# Altium PCB 2104and540_DIP.PcbDoc
Units mil, origin at the board's own origin, x right, y up, seen from the top; angles counter-clockwise.
Board outline 10436 x 9159 mil, 2 copper layers (Top Layer, Bottom Layer); 19 components, 21 nets, 70 pads, 27 vias.
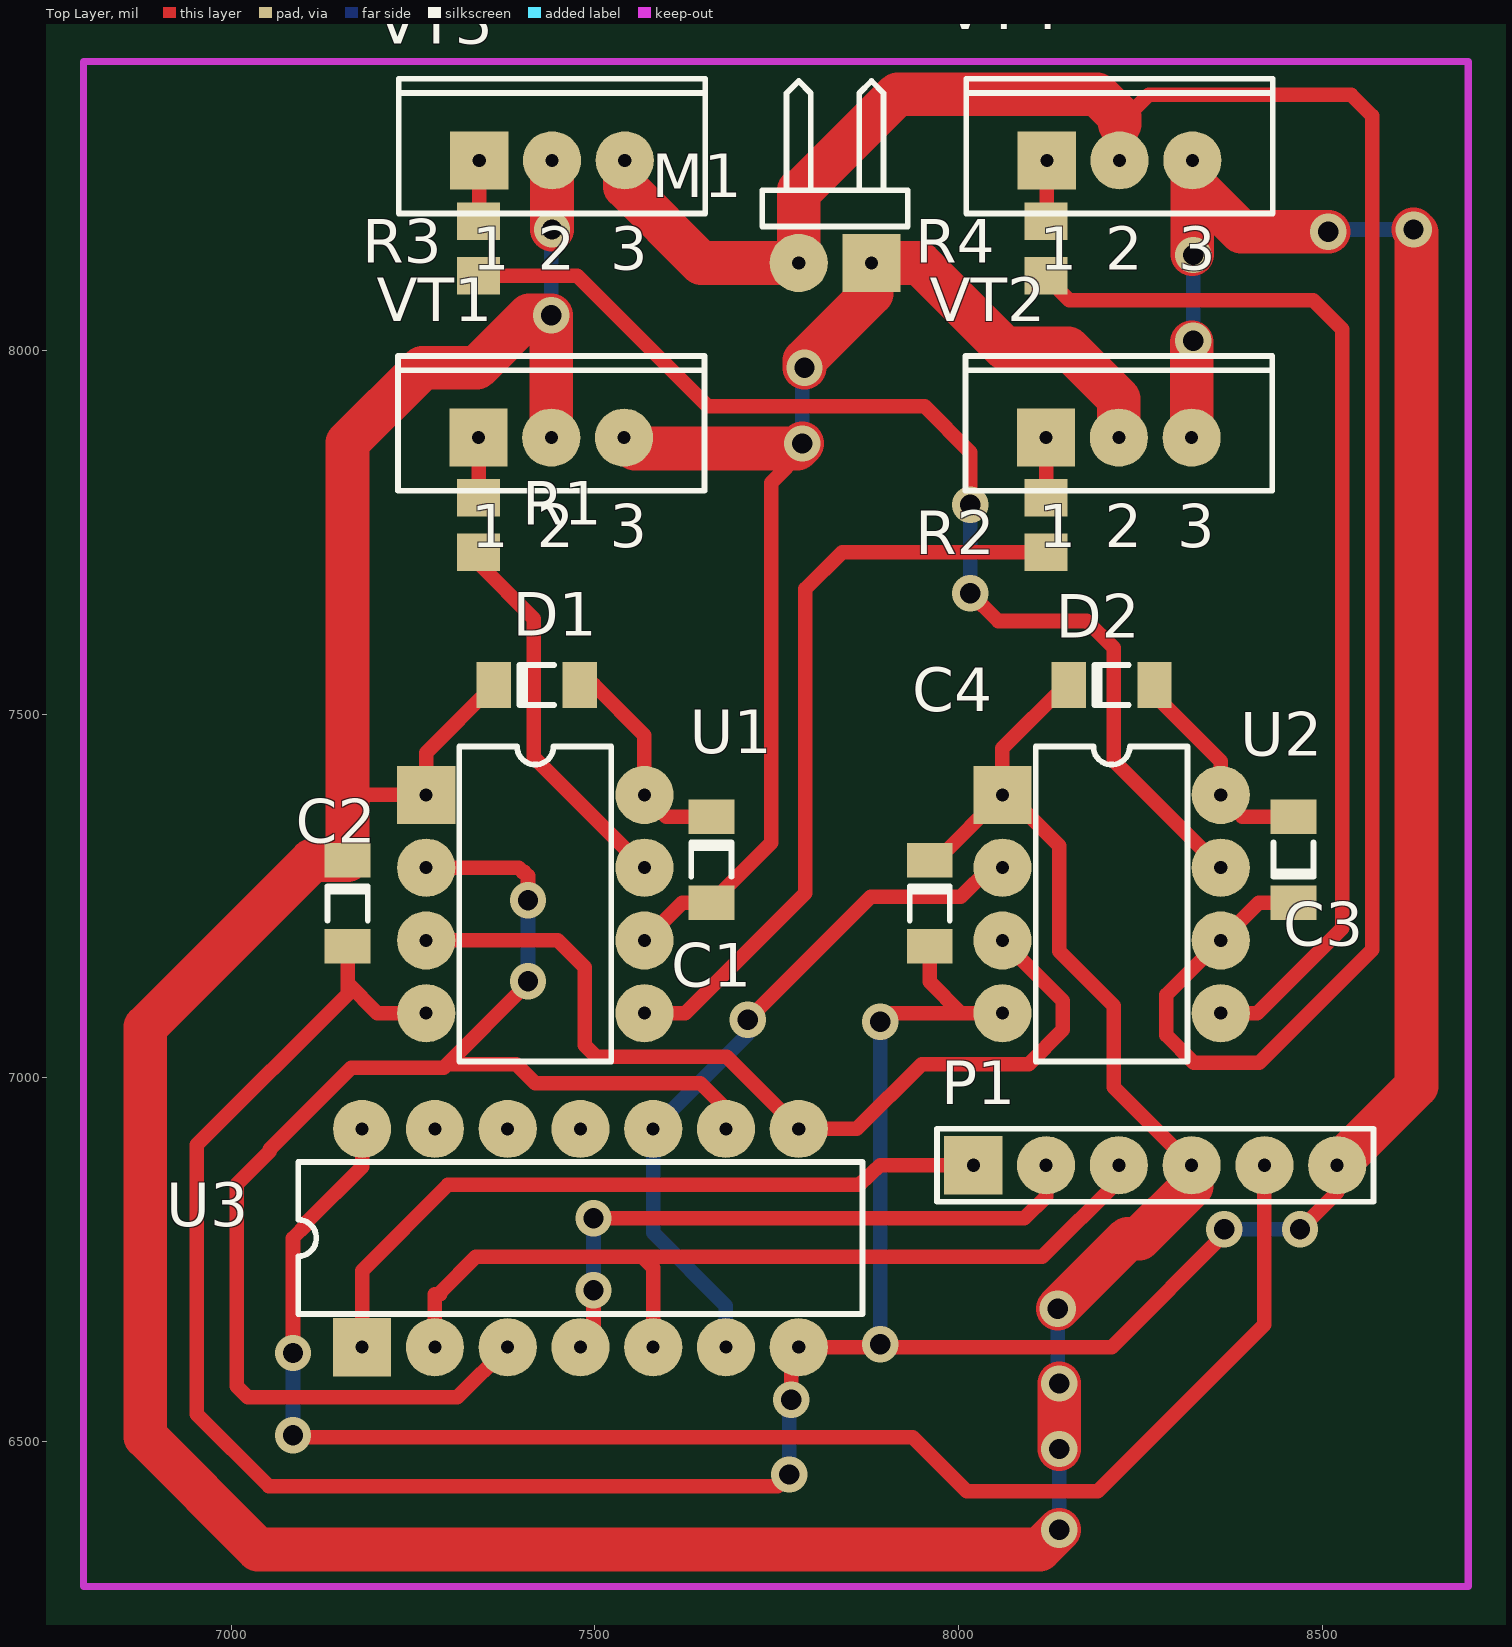
[diagram p0: Top Layer view]
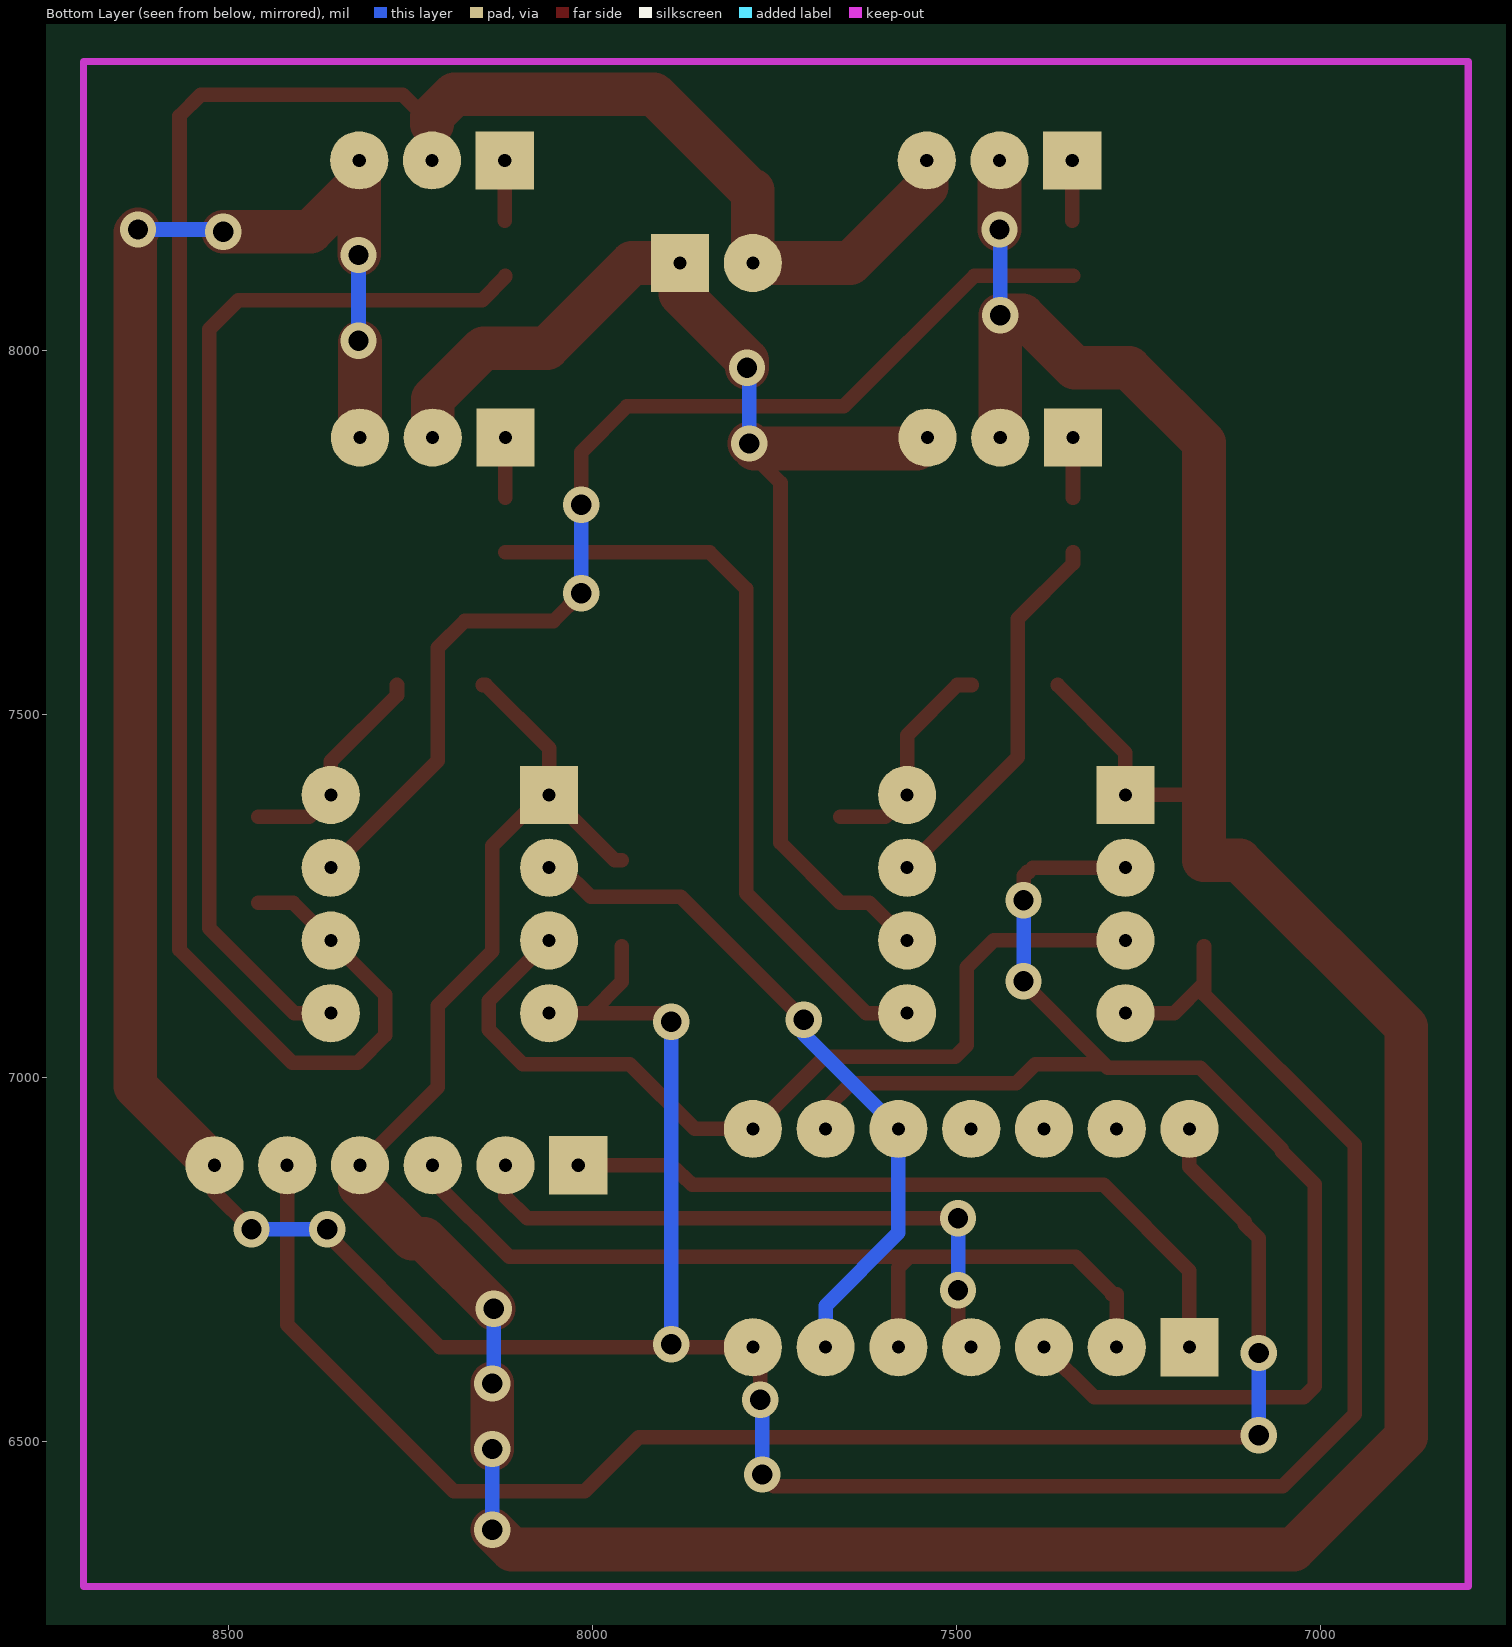
[diagram p1: Bottom Layer view, seen from below]

## Layer stack, top to bottom
Top Layer: signal copper 1.4
Dielectric: dielectric 12.6, FR-4, Dk 4.8
Bottom Layer: signal copper 1.4

## Board outline
1259,9943 1259,1040 11695,1040 11695,10199 1259,10199

## Design rules (kind name [scope] priority, off if disabled: settings)
Clearance [All] p1: gap=10
ComponentClearance [All] p1: gap=10 collisioncheckmode=3 verticalgap=10
PolygonConnect [All] p1: connectstyle=Relief reliefconductorwidth=10 reliefentries=4 polygonreliefangle="90 Angle"
RoutingVias [All] p1: holewidth=28 width=50 viastyle="Through Hole" minholewidth=28 minwidth=50 maxholewidth=28 maxwidth=50
SolderMaskExpansion [All] p1: expansion=4
TestPointUsage [All] p1: valid=0 allowmultiple=FALSE
Testpoint [All] p1: side=15 testpointundercomponent=TRUE minsize=40 maxsize=100 preferedsize=60 minholesize=0 maxholesize=40 preferedholesize=32 testpointgrid=1 style=1023 order=0123456789
Width [All] p1: maxlimit=20 minlimit=10 preferedwidth=10 toplayer_minwidth=20 toplayer_prefwidth=20 bottomlayer_minwidth=20 bottomlayer_prefwidth=20 minimp=50.000000 maximp=50.000000 favimp=50.000000
17 further rules are at their usual default settings.

## Components (designator, comment, footprint, x,y, rotation, side; value= is the part's Value field where it differs from the comment)
C1 "" INDC3216-1206 7660,7300 r270 top
C2 "" INDC3216-1206 7160,7240 r270 top
C3 "Cap" INDC3216-1206 8460,7300 r90 top
C4 "Cap" INDC3216-1206 7960,7240 r270 top
D1 "Diode 1N4148" INDC3216-1206 7420,7540 r0 top
D2 "5819" INDC3216-1206 8210,7540 r0 top
M1 "Motor" HDR1X2H 7880,8120 r180 top
P1 "Header 5" HDR1X6 8020,6880 r0 top (schematic designator P?)
R1 "10" CR2012-0805 7340,7760 r90 top
R2 "10" CR2012-0805 8120,7760 r90 top
R3 "10" CR2012-0805 7340,8140 r270 top
R4 "10" CR2012-0805 8120,8140 r270 top
U1 "IR2104" PDIP8 7418,7239 r270 top
U2 "IR2104" PDIP8 8210,7239 r270 top
U3 "MC74HC00AN" 646-06 7480,6780 r0 top
VT1 "IRF540N" TO-220AB 7440,7880 r0 top
VT2 "IRF540N" TO-220AB 8220,7880 r0 top
VT3 "IRF540N" TO-220AB 7441,8261 r0 top
VT4 "IRF540N" TO-220AB 8221,8261 r0 top

## Footprints (in the part's own frame and the unit in brackets; to place one, negate y for a bottom-side part, rotate by r counter-clockwise, add the part's x,y. Pads: shape width x height; smd on the part's side, far side on the other; paste and mask are expansions set on the pad)
646-06 [mil] "DIP; 14 Leads; Row Spacing 7.62 mm; Pitch 2.54 mm"
  rect 80x80 hole 18: 1(-300,-150)
  round 80 hole 18: 2(-200,-150) 3(-100,-150) 4(0,-150) 5(100,-150) 6(200,-150) 7(300,-150) 8(300,150) 9(200,150) 10(100,150) 11(0,150) 12(-100,150) 13(-200,150) 14(-300,150)
  silkscreen extent -388,-104 388,104
CR2012-0805 [mm] "Chip Resistor; Body 2.0 x 1.3 mm (LxW typ)"
  rect 1.3x1.5 smd: 1(-0.95,0) 2(0.95,0)
HDR1X2H [mil] "Connector; Header; 2 Position; Right Angle"
  rect 80x80 hole 18: 1(0,0)
  round 80 hole 18: 2(100,0)
  silkscreen extent -50,-250 150,-50
HDR1X6 [mil] "Connector; Header; 6 Position"
  rect 80x80 hole 18: 1(0,0)
  round 80 hole 18: 2(100,0) 3(200,0) 4(300,0) 5(400,0) 6(500,0)
  silkscreen extent -50,-50 550,50
INDC3216-1206 [mm] "3216 Chip; Chip Inductor; Body 3.2 x 1.6 mm (LxW typ)"
  rect 1.2x1.6 smd: 1(-1.5,0) 2(1.5,0)
  silkscreen extent -0.6,-0.7 0.6,0.7
PDIP8 [mil] "DIP; 8 Leads; Row Spacing 7.62 mm; Pitch 2.54 mm"
  rect 80x80 hole 18: 1(-150,-150)
  round 80 hole 18: 2(-50,-150) 3(50,-150) 4(150,-150) 5(150,150) 6(50,150) 7(-50,150) 8(-150,150)
  silkscreen extent -217,-104 217,104
TO-220AB [mil] "TO, Thru-Hole, Vertical, Heatsink Mounted; 3 In-Line Leads; Pitch 2.54 mm"
  rect 80x80 hole 18: 1(-100,0)
  round 80 hole 18: 2(0,0) 3(100,0)
  silkscreen extent -211,-73 211,112

## Part data
C1: library part "Cap Semi", "Capacitor (Semiconductor SIM Model)"
C2: library part Cap, "Capacitor"
C3 C4: "Capacitor"
D1: "High Conductance Fast Diode"
D2: library part "Diode 1N4148", "High Conductance Fast Diode"
M1: "Motor, General Kind"
P1: library part "Header 6", "Header, 6-Pin"
R1 R2 R3 R4: library part Res2, "Resistor"
U1 U2: library part IR2104S, "High and Low Side Driver"
U3: library part MC74HC00AD, "Quad 2-Input NAND Gate"
VT1 VT2 VT3 VT4: library part IRF540NS, "HEXFET Power MOSFET"

## Via types
v1: diameter 50, hole 28, Top Layer to Bottom Layer, 27 vias

## Nets (pads, with @x,y where several pads share a name; then routed paths per layer and width w, separated by ;. In a path a pad name is that pad's centre, name@x,y a point inside that pad or via, vN(x,y) a via of type N, cw(c..) or ccw(c..) an arc to the next point about the centre after c; other vN are vias at no path point)
GND: C2.2 C4.2 P1.6 U1.4 U2.4 U3.7 VT2.3 VT4.3 | length 5544.4
  Top Layer w20: 7160,7130 7201,7089 U1.4 ; C2.2 7160,7115 6953,6908 6953,6538 7052,6439 7751,6439 v1(7767,6455) ; v1(7770,6558) 7770,6620 U3.7 8210,6630 8372,6792 v1(8365,6792) ; v1(7892,7077) 7904,7089 U2.4 ; C4.2 7960,7132 8003,7089 ; v1(8469,6792) 8520,6843 P1.6
  Top Layer w60: VT2.3 v1@8320,8011 ; v1@8321,8132 VT4.3 ; VT4.3@8321,8230 8388,8163 v1(8508,8163) ; P1.6 8629,6989 8629,8162 v1(8625,8166)
  Bottom Layer w20: v1(7767,6455) 7767,6555 v1(7770,6558) ; v1(7892,6634) v1(7892,7077) ; v1(8322,8013) v1(8322,8131) ; v1(8365,6792) v1(8469,6792) ; v1(8508,8163) 8511,8166 v1(8625,8166)
NetC1_1: C1.1 D1.2 U1.8 | length 303.9
  Top Layer w20: D1.2 7499,7540 7568,7471 U1.8 7597.94,7359.06 C1.1
NetC1_2: C1.2 M1.1 U1.6 VT1.3 VT2.2 | length 1808.3
  Top Layer w20: U1.6 7619.94,7240.94 C1.2 7742,7322.94 7742,7818 7785,7861 v1(7785,7872)
  Top Layer w60: VT1.3 7555,7865 7778,7865 v1(7785,7872) ; v1(7788,7976) 7788,7986 7880,8078 M1.1 7946,8120 8063,8003 8150,8003 8220,7933 VT2.2
  Bottom Layer w20: v1(7785,7872) 7785,7973 v1(7788,7976)
NetC3_1: C3.1 M1.2 U2.6 VT3.3 VT4.2 | length 3154.1
  Top Layer w20: VT4.2 8221,8311 8261,8351 8539,8351 8568,8322 8568,7176 8413,7021 8323,7021 8285,7059 8285,7114 8411.94,7240.94 C3.1
  Top Layer w60: VT3.3 7541,8225 7646,8120 M1.2 7780,8220 7784,8220 7916,8352 8190,8352 8221,8321 8221,8311
NetC3_2: C3.2 D2.2 U2.8 | length 301.1
  Top Layer w20: D2.2 8269.06,7525.94 8360,7435 U2.8 8389.94,7359.06 C3.2
NetP1_1: P1.1 U3.1 | length 1004.5
  Top Layer w20: U3.1 7180,6735 7298,6853 7863,6853 7892,6880 P1.1
NetP1_2: P1.2 U3.4 | length 861.9
  Top Layer w20: U3.4 7498,6648 v1(7498,6708) ; v1(7498,6807) 8090,6807 8120,6837 P1.2
  Bottom Layer w20: v1(7498,6708) v1(7498,6807)
NetP1_3: P1.3 U3.2 U3.5 | length 1230
  Top Layer w20: U3.2 7280,6703 7287,6703 7287,6705 7336,6754 8115,6754 8220,6859 P1.3 ; 7565,6754 7580,6739 U3.5
NetR1_1: R1.1 U1.7 | length 528
  Top Layer w20: R1.1 7340,7707 7416,7631 7416,7441 U1.7
NetR1_2: R1.2 VT1.1 | length 82.6
  Top Layer w20: R1.2 VT1.1
NetR2_1: R2.1 U1.5 | length 1059.3
  Top Layer w20: U1.5 7624,7089 7789,7254 7789,7672 7839.6,7722.6 R2.1
NetR2_2: R2.2 VT2.1 | length 82.6
  Top Layer w20: R2.2 VT2.1
NetR3_1: R3.1 VT3.1 | length 82.6
  Top Layer w20: R3.1@7341,8178.4 VT3.1
NetR3_2: R3.2 U2.7 | length 1561.4
  Top Layer w20: R3.2 7475.4,8102.6 7655,7923 7953,7923 8016,7860 v1(8016,7788) ; v1(8016,7666) 8054,7628 8176,7628 8213,7591 8213,7436 U2.7
  Bottom Layer w20: v1(8016,7666) v1(8016,7788)
NetR4_1: R4.1 VT4.1 | length 82.6
  Top Layer w20: R4.1@8121,8178.4 VT4.1
NetR4_2: R4.2 U2.5 | length 1476.9
  Top Layer w20: R4.2 8120,8101 8152,8069 8487,8069 8527,8029 8527,7206 8410,7089 U2.5
NetU1_2: U1.2 U3.3 U3.9 | length 1926.7
  Top Layer w20: U1.2 7395,7289 7401,7283 7403,7283 7408,7278 v1(7408,7244) ; 7297,7019 7392,7019 7418,6993 7645,6993 7680,6958 U3.9 ; U3.3 7311,6561 7023,6561 7008,6576 7008,6854 7053,6899 7053,6902 7165,7014 7292,7014 v1@7408,7130
  Bottom Layer w20: v1(7408,7133) v1(7408,7244)
NetU1_3: U1.3 U2.3 U3.8 | length 1258.7
  Top Layer w20: U1.3 7449,7189 7486,7152 7486,7045 7502,7029 7681,7029 U3.8 7860,6930 7949,7019 8096,7019 8143,7066 8143,7106 U2.3
NetU2_2: U2.2 U3.6 U3.10 | length 981.8
  Top Layer w20: v1(7710,7080) 7879,7249 8003,7249 8043,7289 U2.2
  Bottom Layer w20: U3.6 7680,6687 7580,6787 U3.10 7710,7060 v1(7710,7080)
VCC: C2.1 C4.1 D1.1 D2.1 P1.4 U1.1 U2.1 VT1.2 VT3.2 | length 5414.6
  Top Layer w20: C2.1 C2.1@7160,7307 ; 7160,7377 7172,7389 U1.1 7268,7447.06 D1.1 ; C4.1 7970.06,7299.06 U2.1 ; D2.1 8147,7540 8060,7453 U2.1 ; P1.4 8213,6987 8213,7099 8138,7174 8138,7319 8068,7389 U2.1
  Top Layer w60: C2.1 7111.06,7299.06 6882,7070 6882,6507 7037,6352 8111,6352 v1(8138,6379) ; C2.1@7160,7307 7160,7873 7263,7976 7337.53,7976 7409.53,8048 v1(7440,8048) VT1.2 ; v1(7441,8166) VT3.2 ; v1(8136,6683) 8232,6779 8248,6779 8320,6851 P1.4 ; v1(8138,6490) v1(8138,6580)
  Bottom Layer w20: v1(7440,8048) 7440,8165 v1(7441,8166) ; v1(8136,6683) 8136,6582 v1(8138,6580) ; v1(8138,6379) v1(8138,6490)
VDD: P1.5 U3.14 | length 2142.9
  Top Layer w20: v1(7085,6509) 7085,6506 7937,6506 8011,6432 8191,6432 8420,6661 P1.5 ; v1(7085,6622) 7085,6780 7104,6799 7104,6802 7180,6878 U3.14
  Bottom Layer w20: v1(7085,6509) v1(7085,6622)
pads on no net: U3.11 U3.12 U3.13

## Keep-outs
Keep-Out Layer:
  lines w10: 6797,6301 8700,6301 8700,8397 6797,8397 6797,6301

## Text inside footprints (layer, text, board x,y; h text height)
VT1: Top Overlay "2" at 7420.31,7729.41 h59.06; Top Overlay "1" at 7330.16,7729.41 h59.06; Top Overlay "3" at 7520.31,7729.41 h59.06
VT2: Top Overlay "2" at 8200.32,7729.41 h59.06; Top Overlay "1" at 8110.16,7729.41 h59.06; Top Overlay "3" at 8300.32,7729.41 h59.06
VT3: Top Overlay "2" at 7421.31,8110.41 h59.06; Top Overlay "1" at 7331.16,8110.41 h59.06; Top Overlay "3" at 7521.31,8110.41 h59.06
VT4: Top Overlay "2" at 8201.32,8110.41 h59.06; Top Overlay "1" at 8111.16,8110.41 h59.06; Top Overlay "3" at 8301.32,8110.41 h59.06